# Altium PCB Host.PcbDoc
Units mil, origin at the board's own origin, x right, y up, seen from the top; angles counter-clockwise.
Board outline 4600 x 2400 mil, 2 copper layers (Top Layer, Bottom Layer); 15 components, 10 nets, 66 pads, 0 vias.
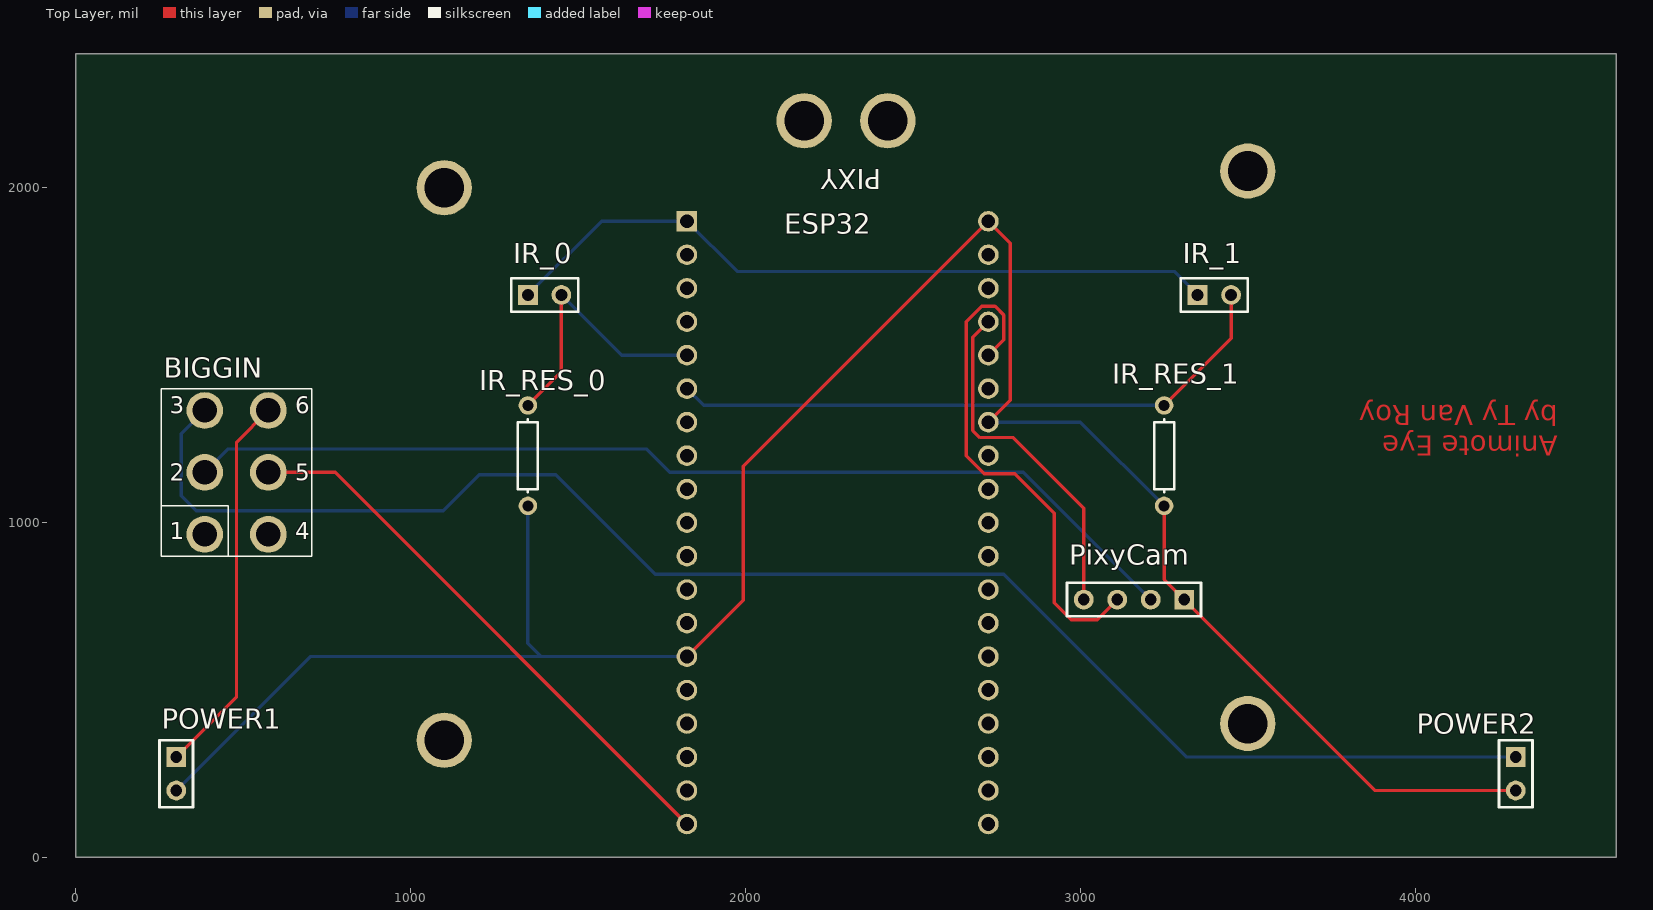
[diagram p0: Top Layer view]
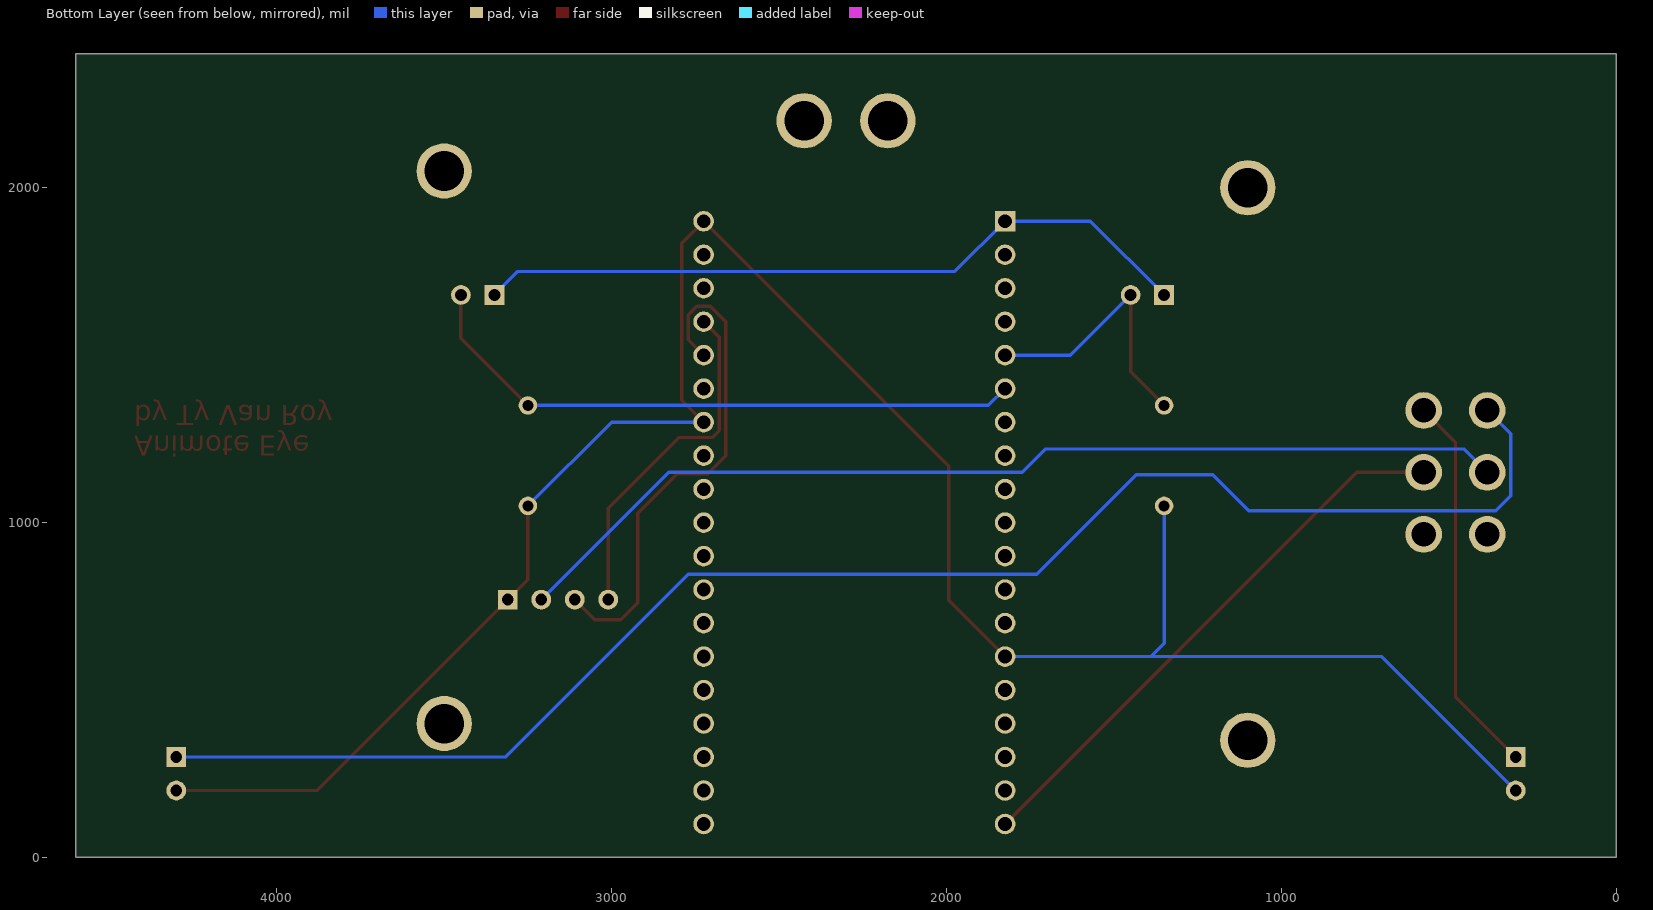
[diagram p1: Bottom Layer view, seen from below]

## Layer stack, top to bottom
Top Solder: solder mask 0.4, Solder Resist, Dk 3.5
Top Layer: signal copper 1.4
Dielectric 1: dielectric 12.6, FR-4, Dk 4.8
Bottom Layer: signal copper 1.4
Bottom Solder: solder mask 0.4, Solder Resist, Dk 3.5

## Board outline
0,0 4600,0 4600,2400 0,2400
cut-out: 0,2500

## Design rules (kind name [scope] priority, off if disabled: settings)
Clearance [All] p1: gap=10 ignorepadtopadclearanceinfootprint=FALSE except(0: Arc-Hole Track-Hole SMDPad-Hole THPad-Hole Via-Hole Fill-Hole Poly-Hole Region-Hole Text-Hole)
PolygonConnect [All] p1: connectstyle=Relief reliefconductorwidth=10 reliefentries=4 polygonreliefangle="90 Angle" airgapwidth=10
RoutingVias [All] p1: holewidth=28 width=50 viastyle="Through Hole" minholewidth=28 minwidth=50 maxholewidth=28 maxwidth=50
SolderMaskExpansion [All] p1: expansion=4 istentingtop=FALSE
Width [All] p1: maxlimit=10 minlimit=10 preferedwidth=10
30 further rules are at their usual default settings.

## Classes and differential pairs
component class Host: BIGGIN ESP32 IR_0 IR_1 IR_RES_0 IR_RES_1 PixyCam POWER1 POWER2

## Components (designator, comment, footprint, x,y, rotation, side; value= is the part's Value field where it differs from the comment)
BAT_SCREW0 "Hole 3mm" "Hole 3mm"#1 1100,2050 r90 top
BAT_SCREW1 "Hole 3mm" "Hole 3mm"#2 1100,150 r90 top
BAT_SCREW2 "Hole 3mm" "Hole 3mm"#3 3850,1800 r90 top
BAT_SCREW3 "Hole 3mm" "Hole 3mm"#4 2278.94,1865 r90 top
BIGGIN "100DP1T1B1M2QEH" 100DP1T1B1M2QEH 480,1150 r0 top (schematic designator SW)
ESP32 "ESP32-DEVKITC-32D" ESP32-NODEMCU 2305,1102.05 r0 top
IR_0 "Photo NPN" IR_HEAD 1300,1700 r0 top
IR_1 "Photo NPN" IR_HEAD 3300,1700 r0 top
IR_RES_0 "Res1" AXIAL-0.3 1350,1200 r270 top value=1K
IR_RES_1 "Res1" AXIAL-0.3 3250,1200 r270 top value=1K
PIXY "Hole 3mm" "Hole 3mm"#5 2550,2200 r90 top (schematic designator PIXY_SCREW0)
PIXY_SCREW1 "Hole 3mm" "Hole 3mm"#6 2000,2200 r90 top
PixyCam "Header 4" HDR1X4 3310,770 r180 top
POWER1 "Header 2" HDR1X2 300,300 r270 top
POWER2 "Header 2" HDR1X2 4300,300 r270 top

## Footprints (in the part's own frame and the unit in brackets; to place one, negate y for a bottom-side part, rotate by r counter-clockwise, add the part's x,y. Pads: shape width x height; smd on the part's side, far side on the other; paste and mask are expansions set on the pad)
100DP1T1B1M2QEH [mil]
  round 109.5 hole 73: 1(-95,-185) 2(-95,0) 3(-95,185) 4(95,-185) 5(95,0) 6(95,185)
  silkscreen extent -225,-250 225,250
AXIAL-0.3 [mm] "Axial Device, Thru-Hole; 2 Leads; 0.3 in Pin Spacing"
  round 1.4 hole 0.85: 1(-3.81,0) 2(3.81,0)
  silkscreen extent -2.77,-0.76 2.77,0.76
ESP32-NODEMCU [mm]
  rect 1.56x1.56 hole 1.04: 1(-12.192,20.268)
  round 1.56 hole 1.04: 2(-12.192,17.728) 3(-12.192,15.188) 4(-12.192,12.648) 5(-12.192,10.108) 6(-12.192,7.568) 7(-12.192,5.028) 8(-12.192,2.488) 9(-12.192,-0.052) 10(-12.192,-2.592) 11(-12.192,-5.132) 12(-12.192,-7.672) 13(-12.192,-10.212) 14(-12.192,-12.752) 15(-12.192,-15.292) 16(-12.192,-17.832) 17(-12.192,-20.372) 18(-12.192,-22.912) 19(-12.192,-25.452) 20(10.668,20.268) 21(10.668,17.728) 22(10.668,15.188) 23(10.668,12.648) 24(10.668,10.108) 25(10.668,7.568) 26(10.668,5.028) 27(10.668,2.488) 28(10.668,-0.052) 29(10.668,-2.592) 30(10.668,-5.132) 31(10.668,-7.672) 32(10.668,-10.212) 33(10.668,-12.752) 34(10.668,-15.292) 35(10.668,-17.832) 36(10.668,-20.372) 37(10.668,-22.912) 38(10.668,-25.452)
HDR1X2 [mm] "Connector; Header; 2 Position"
  rect 1.5x1.5 hole 0.9: 1(0,0)
  round 1.5 hole 0.9: 2(2.54,0)
  silkscreen extent -1.27,-1.27 3.81,1.27
HDR1X4 [mm] "Connector; Header; 4 Position"
  rect 1.5x1.5 hole 0.9: 1(0,0)
  round 1.5 hole 0.9: 2(2.54,0) 3(5.08,0) 4(7.62,0)
  silkscreen extent -1.27,-1.27 8.89,1.27
"Hole 3mm"#1 [mil]
  round 165 hole 118.11: 1(-50,0)
"Hole 3mm"#2 [mil]
  round 165 hole 118.11: 1(200,0)
"Hole 3mm"#3 [mil]
  round 165 hole 118.11: 1(250,350)
"Hole 3mm"#4 [mil]
  round 165 hole 118.11: 1(-1465,-1221.06)
"Hole 3mm"#5 [mil]
  round 165 hole 118.11: 1(0,125)
"Hole 3mm"#6 [mil]
  round 165 hole 118.11: 1(0,-175)
IR_HEAD [mm]
  rect 1.5x1.5 hole 0.9: 1(1.27,-0.508)
  round 1.5 hole 0.9: 3(3.81,-0.508)
  silkscreen extent 0,-1.78 5.08,0.76

## Part data
BIGGIN: "Toggle Switch DPDT Panel Mount", Package=None, Availability=Unavailable, MF=E-Switch, MP=100DP1T1B1M2QEH, Price=None, SnapEDA_Link=https://www.snapeda.com/parts/100DP1T1B1M2QEH/E-Switch/view-part/423930/?ref=snap
ESP32: "- Transceiver; 802.11 b/g/n _Wi-Fi, WiFi, WLAN_, BluetoothÂ® Smart Ready 4.x Dual Mode For Use With ESP-WROOM-32", Package=None, Availability=Unavailable, MF="Espressif Systems", MP=ESP32-DEVKITC-32D, Price=None, SnapEDA_Link=https://www.snapeda.com/parts/ESP32-DEVKITC-32D/Espressif%20Systems/view-part/2777395/?ref=snap
IR_0 IR_1: "NPN Phototransistor", Code_JEDEC=TO-220-AC, LatestRevisionDate=17-Jul-2002, LatestRevisionNote="Re-released for DXP Platform.", PackageReference=TO-220_A, Published=24-Mar-1999, Publisher="Altium Limited"
IR_RES_0 IR_RES_1: "Resistor", LatestRevisionDate=17-Jul-2002, LatestRevisionNote="Re-released for DXP Platform.", PackageDescription="Axial Device, Thru-Hole; 2 Leads; 0.3 in Pin Spacing", PackageReference=AXIAL-0.3, Published=8-Jun-2000, Publisher="Altium Limited"
PixyCam: "Header, 4-Pin", LatestRevisionDate=17-Jul-2002, LatestRevisionNote="Re-released for DXP Platform.", Publisher="Altium Limited"
POWER1 POWER2: "Header, 2-Pin", LatestRevisionDate=17-Jul-2002, LatestRevisionNote="Re-released for DXP Platform.", Publisher="Altium Limited"

## Nets (pads, with @x,y where several pads share a name; then routed paths per layer and width w, separated by ;. In a path a pad name is that pad's centre, name@x,y a point inside that pad or via, vN(x,y) a via of type N, cw(c..) or ccw(c..) an arc to the next point about the centre after c; other vN are vias at no path point)
+3.3: ESP32.1 IR_0.1 IR_1.1 | length 2182.3
  Bottom Layer w10: IR_0.1 1570,1900 ESP32.1 1975,1750 3280,1750 IR_1.1
GND: ESP32.14 ESP32.20 ESP32.26 IR_RES_0.2 IR_RES_1.2 PixyCam.1 POWER1.2 POWER2.2 | length 6644
  Top Layer w10: ESP32.14 1993,768 1993,1168 ESP32.20 2790.71,1834.29 2790.71,1365.71 ESP32.26 ; IR_RES_1.2 3250,830 PixyCam.1 3880,200 POWER2.2
  Bottom Layer w10: POWER1.2 700,600 1390,600 ; IR_RES_0.2 1350,640 1390,600 ; ESP32.14 1390,600 ; ESP32.26 3000,1300 IR_RES_1.2
IR_IN_0: ESP32.5 IR_0.3 IR_RES_0.1 | length 821
  Top Layer w10: IR_RES_0.1 1450,1450 IR_0.3
  Bottom Layer w10: IR_0.3 1630,1500 ESP32.5
IR_IN_1: ESP32.6 IR_1.3 IR_RES_1.1 | length 1858.6
  Top Layer w10: IR_RES_1.1 3450,1550 IR_1.3
  Bottom Layer w10: ESP32.6 1875,1350 IR_RES_1.1
RX: ESP32.24 PixyCam.3 | length 1516
  Top Layer w10: ESP32.24 2770.71,1545.71 2770.71,1620 2745,1645.71 2704.71,1645.71 2659,1600 2659,1200 2713,1146 2804,1146 2922,1028 2922,760 2972,710 3050,710 PixyCam.3
TX: ESP32.23 PixyCam.4 | length 1044.2
  Top Layer w10: ESP32.23 2679,1554 2679,1275 2700,1254 2799,1254 3010,1043 PixyCam.4
VCC_0: BIGGIN.5 ESP32.19 | length 1684.9
  Top Layer w10: BIGGIN.5 775,1150 ESP32.19
VCC_1: BIGGIN.2 PixyCam.2 | length 3040.4
  Bottom Layer w10: BIGGIN.2 455,1220 1703,1220 1773,1150 2830,1150 PixyCam.2
VCC_IN_0: BIGGIN.6 POWER1.1 | length 1148.9
  Top Layer w10: POWER1.1 480,480 480,1240 BIGGIN.6
VCC_IN_1: BIGGIN.3 POWER2.1 | length 4681.6
  Bottom Layer w10: BIGGIN.3 315,1265 315,1080 360,1035 1097,1035 1205,1143 1433,1143 1730,846 2771,846 3317,300 POWER2.1
pads on no net: BAT_SCREW0.1 BAT_SCREW1.1 BAT_SCREW2.1 BAT_SCREW3.1 BIGGIN.1 BIGGIN.4 ESP32.2 ESP32.3 ESP32.4 ESP32.7 ESP32.8 ESP32.9 ESP32.10 ESP32.11 ESP32.12 ESP32.13 ESP32.15 ESP32.16 ESP32.17 ESP32.18 ESP32.21 ESP32.22 ESP32.25 ESP32.27 ESP32.28 ESP32.29 ESP32.30 ESP32.31 ESP32.32 ESP32.33 ESP32.34 ESP32.35 ESP32.36 ESP32.37 ESP32.38 PIXY.1 PIXY_SCREW1.1

## Other copper
Top Layer:
  text "Animote Eye / by Ty Van Roy" at 4425,1350 h60 r180

## Text inside footprints (layer, text, board x,y; h text height)
BIGGIN: Top Overlay "1" at 280,950 h50; Top Overlay "2" at 280,1125 h50; Top Overlay "3" at 280,1325 h50; Top Overlay "4" at 655,950 h50; Top Overlay "5" at 655,1125 h50; Top Overlay "6" at 655,1325 h50